# Altium PCB PCB1.PcbDoc
Units mil, origin at the board's own origin, x right, y up, seen from the top; angles counter-clockwise.
Board outline 847 x 1107 mil, 2 copper layers (Top Layer, Bottom Layer); 6 components, 3 nets, 36 pads, 47 vias.
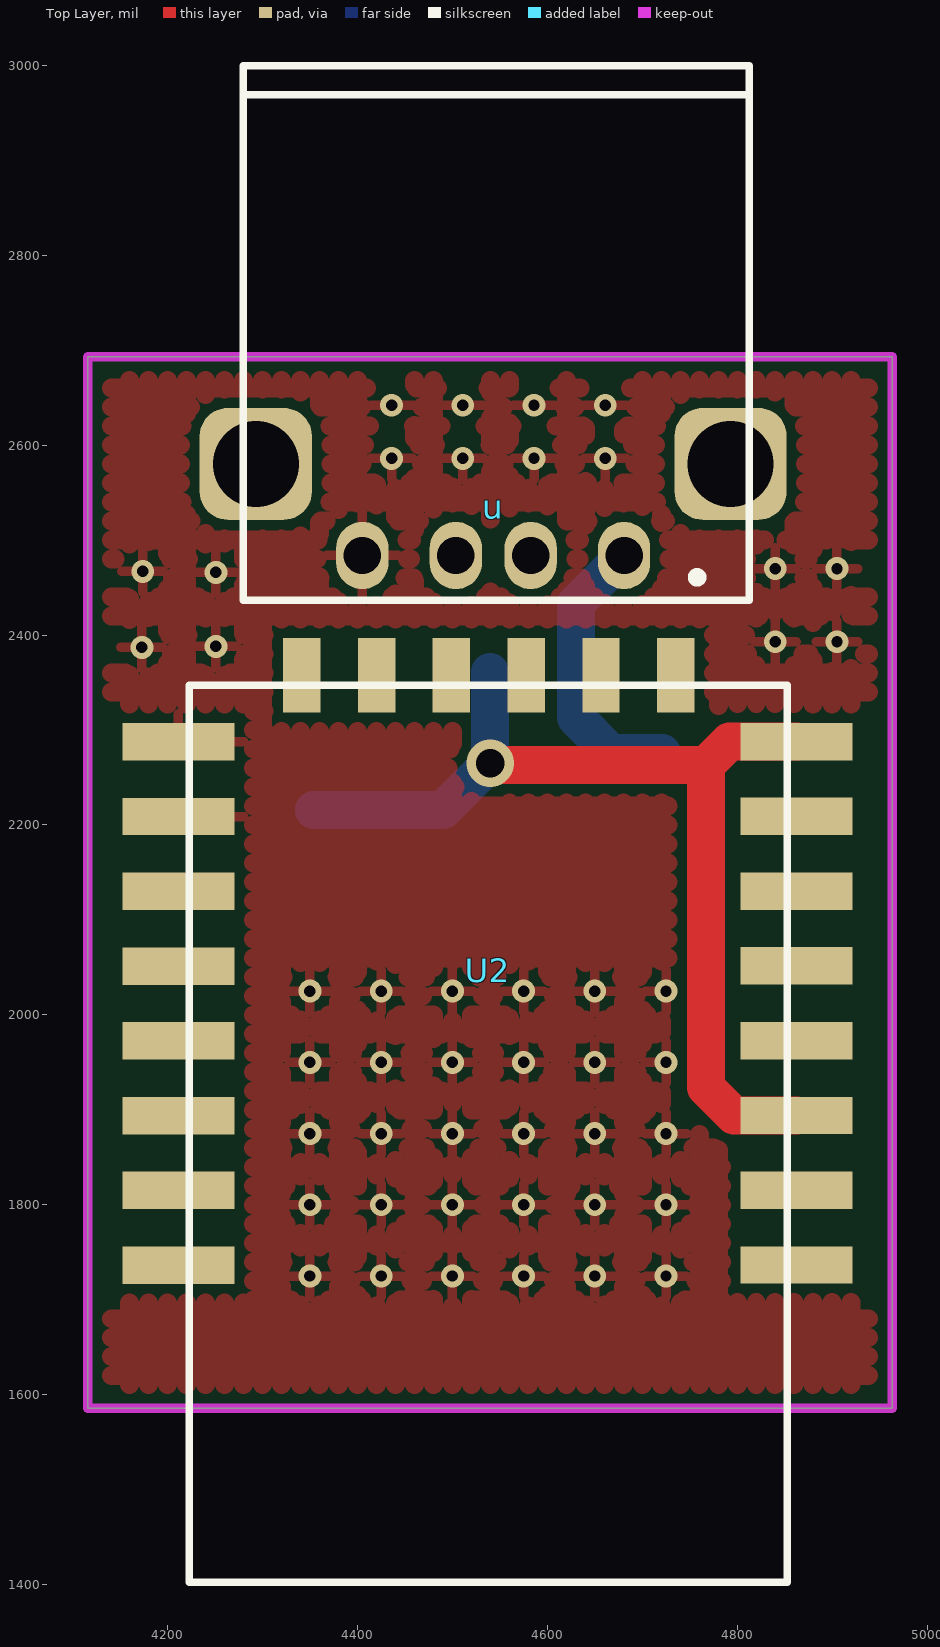
[diagram p0: Top Layer view]
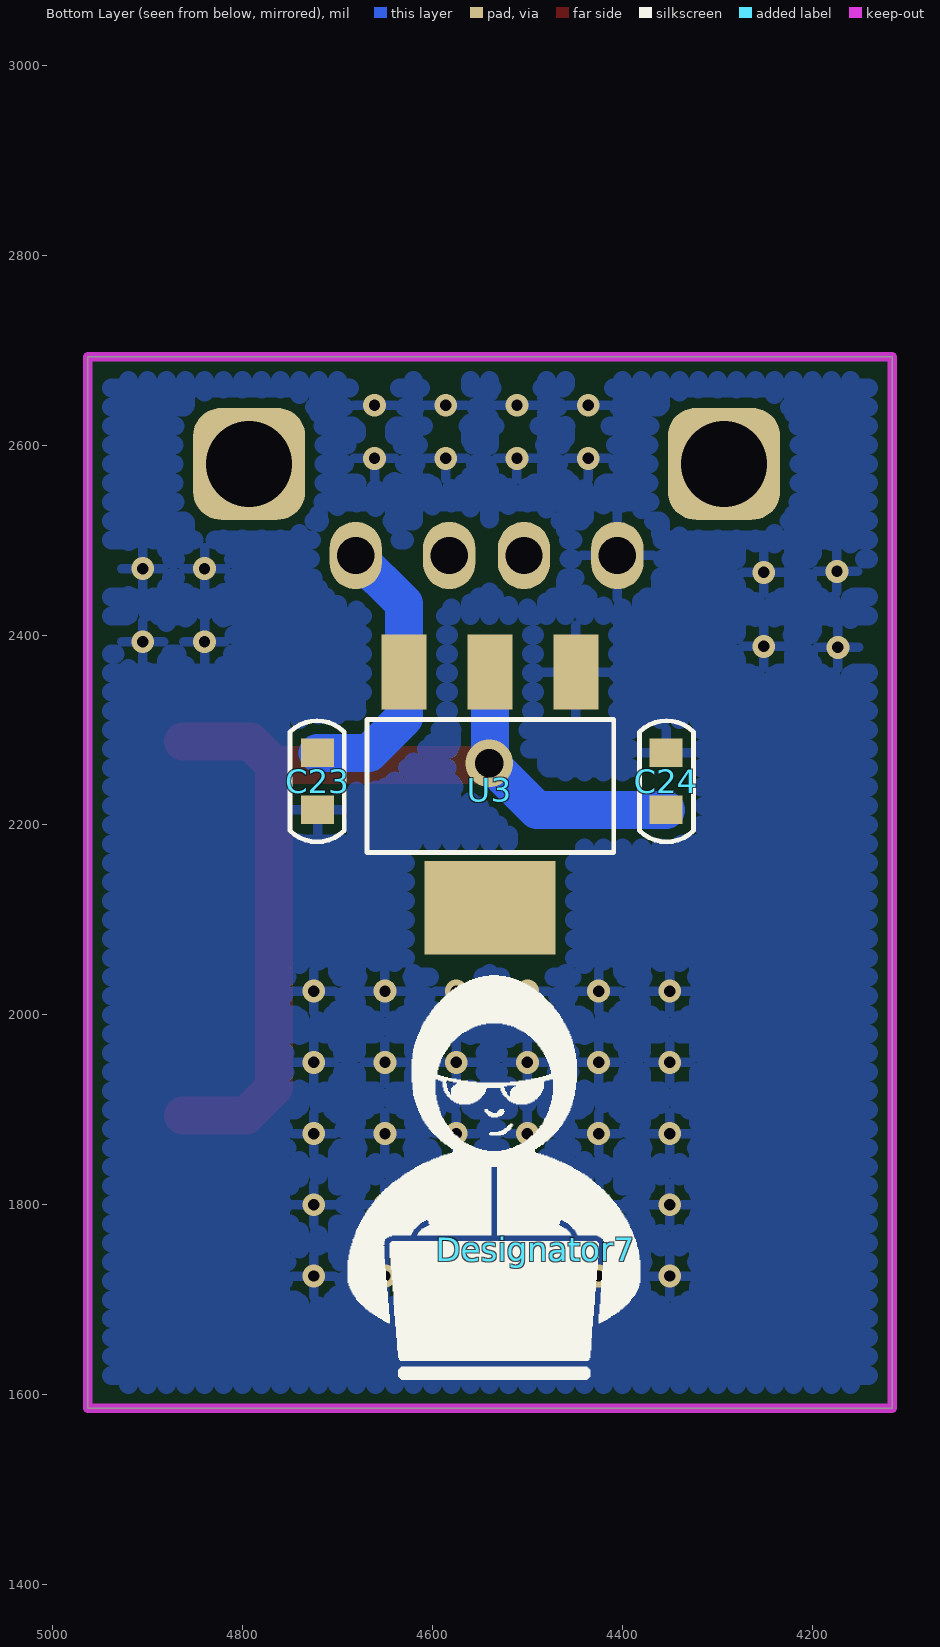
[diagram p1: Bottom Layer view, seen from below]

## Layer stack, top to bottom
Top Layer: signal copper 1.4
Dielectric: dielectric 12.6, FR-4, Dk 4.8
Bottom Layer: signal copper 1.4

## Board outline
4116,2693 4116,1586 4963,1586 4963,2693 4116,2693

## Design rules (kind name [scope] priority, off if disabled: settings)
Clearance [All] p1: gap=10
PolygonConnect [All] p1: connectstyle=Relief reliefconductorwidth=10 reliefentries=4 polygonreliefangle="90 Angle"
RoutingVias [All] p1: holewidth=28 width=50 viastyle="Through Hole" minholewidth=28 minwidth=50 maxholewidth=28 maxwidth=50
SilkscreenOverComponentPads [All] p1: minsilkscreentomaskgap=10
SolderMaskExpansion [All] p1: expansion=4
Width [All] p1: maxlimit=100 minlimit=20 preferedwidth=20
27 further rules are at their usual default settings.

## Classes and differential pairs
component class Sheet1: C23 C24 u U2 U3

## Components (designator, comment, footprint, x,y, rotation, side; value= is the part's Value field where it differs from the comment)
C23 "Cap" 0603C 4721,2246 r90 bottom
C24 "Cap" 0603C 4354,2246 r270 bottom
Designator7 "Comment" logo 4491,1753 r180 bottom
u "usb" PCBComponent_1 4543,2532 r0 top
U2 "ESP-12F" LCC22_wifi 4537,2047 r180 top
U3 "1117" SOT223 4449,2361 r0 bottom

## Footprints (in the part's own frame and the unit in brackets; to place one, negate y for a bottom-side part, rotate by r counter-clockwise, add the part's x,y. Pads: shape width x height; smd on the part's side, far side on the other; paste and mask are expansions set on the pad)
0603C [mil]
  rect 30x35 smd: 1(-30,0) 2(30,0)
  silkscreen extent -64,-28 64,29, body extent -50,-18 52,21, height 35
LCC22_wifi [mm]
  rect 3x1 smd: 1(-8.268,7.884) 2(-8.268,5.884) 3(-8.268,3.884) 4(-8.268,1.884) 5(-8.268,-0.116) 6(-8.268,-2.116) 7(-8.268,-4.116) 8(-8.268,-6.116) 15(8.268,-6.111) 16(8.268,-4.111) 17(8.268,-2.111) 18(8.268,-0.111) 19(8.268,1.889) 20(8.268,3.889) 21(8.268,5.889) 22(8.268,7.889)
  rect 1x2 smd: 9(-5.034,-7.889) 10(-3.034,-7.889) 11(-1.034,-7.889) 12(0.966,-7.889) 13(2.966,-7.889) 14(4.966,-7.889)
  silkscreen extent -8.02,-7.63 7.98,16.37
logo [mil]
  silkscreen extent -198,-137 110,288
PCBComponent_1 [mm]
  oval 1.4x1.8 hole 1: 1(3.5,-1.225) 2(1,-1.225) 3(-1,-1.225) 4(-3.5,-1.225)
  rrect50% 3x3 hole 2.3: 5(6.35,1.225) 6(-6.35,1.225)
  silkscreen extent -6.69,-2.42 6.85,11.88
SOT223 [mm]
  rect 3.5x2.5 smd: 0(2.3,6.3)
  rect 1.2x2 smd: 1(0,0) 2(2.3,0) 3(4.6,0)
  silkscreen extent -1.02,1.27 5.59,4.83

## Part data
C23 C24: "Capacitor"

## Via types
v1: diameter 24, hole 12, Top Layer to Bottom Layer, tented both sides, 46 vias
v2: diameter 50, hole 30, Top Layer to Bottom Layer, tented both sides, 1 vias

## Nets (pads, with @x,y where several pads share a name; then routed paths per layer and width w, separated by ;. In a path a pad name is that pad's centre, name@x,y a point inside that pad or via, vN(x,y) a via of type N, cw(c..) or ccw(c..) an arc to the next point about the centre after c; other vN are vias at no path point)
3.3: C24.2 U2.3 U2.8 U3.2 | length 1081.5
  Top Layer w40: v2@4540,2263 4767,2263 ; U2.3 4796.53,1894.07 4767,1923.6 4767,2263 ; U2.8 4791.77,2287.77 4767,2263
  Bottom Layer w40: C24.2 4490.1,2216 4539.55,2265.45 U3.2
  other v2: 4540,2265
GND: C23.1 C24.1 U2.15 U2.16 U3.1 u.4
  other v1: 4350,1725 4425,1725 4500,1725 4575,1725 4650,1725 4725,1725 4350,1800 4425,1800 4500,1800 4575,1800 4650,1800 4725,1800 4350,1875 4425,1875 4500,1875 4575,1875 4650,1875 4725,1875 4350,1950 4425,1950 4500,1950 4575,1950 4650,1950 4725,1950 4350,2025 4425,2025 4500,2025 4575,2025 4650,2025 4725,2025 4173,2387 4251,2388 4840,2393 4905,2393 4251,2466 4174,2467 4840,2470 4905,2470 4436,2586 4511,2586 4586,2586 4661,2586 4436,2642 4511,2642 4586,2642 4661,2642
VCC: C23.2 U3.3 u.1 | length 298.1
  Bottom Layer w40: u.1 4630.1,2433.08 U3.3 4630.1,2312.9 4667,2276 C23.2
pads on no net: U2.1 U2.2 U2.4 U2.5 U2.6 U2.7 U2.9 U2.10 U2.11 U2.12 U2.13 U2.14 U2.17 U2.18 U2.19 U2.20 U2.21 U2.22 U3.0 u.2 u.3 u.5 u.6

## Polygon pours and split planes (outlines as drawn)
GND on Bottom Layer "Bottom Layer-No Net" (hatched 90Degree grid 20 track 20, remove dead copper, pour order 4): 4116,2693 4116,1586 4963,1586 4963,2693 4116,2693
GND on Top Layer "Bottom Layer-No Net" (hatched 90Degree grid 20 track 20, remove dead copper, pour order 6): 4116,2693 4116,1586 4963,1586 4963,2693 4116,2693

## Keep-outs
Keep-Out Layer:
  the board outline again, w10